# Altium PCB v3.pcbdoc
Units mm, origin at the board's own origin, x right, y up, seen from the top; angles counter-clockwise.
Board outline 55.63 x 53.1 mm, 2 copper layers (Top Layer, Bottom Layer); 30 components, 26 nets, 99 pads, 22 vias.
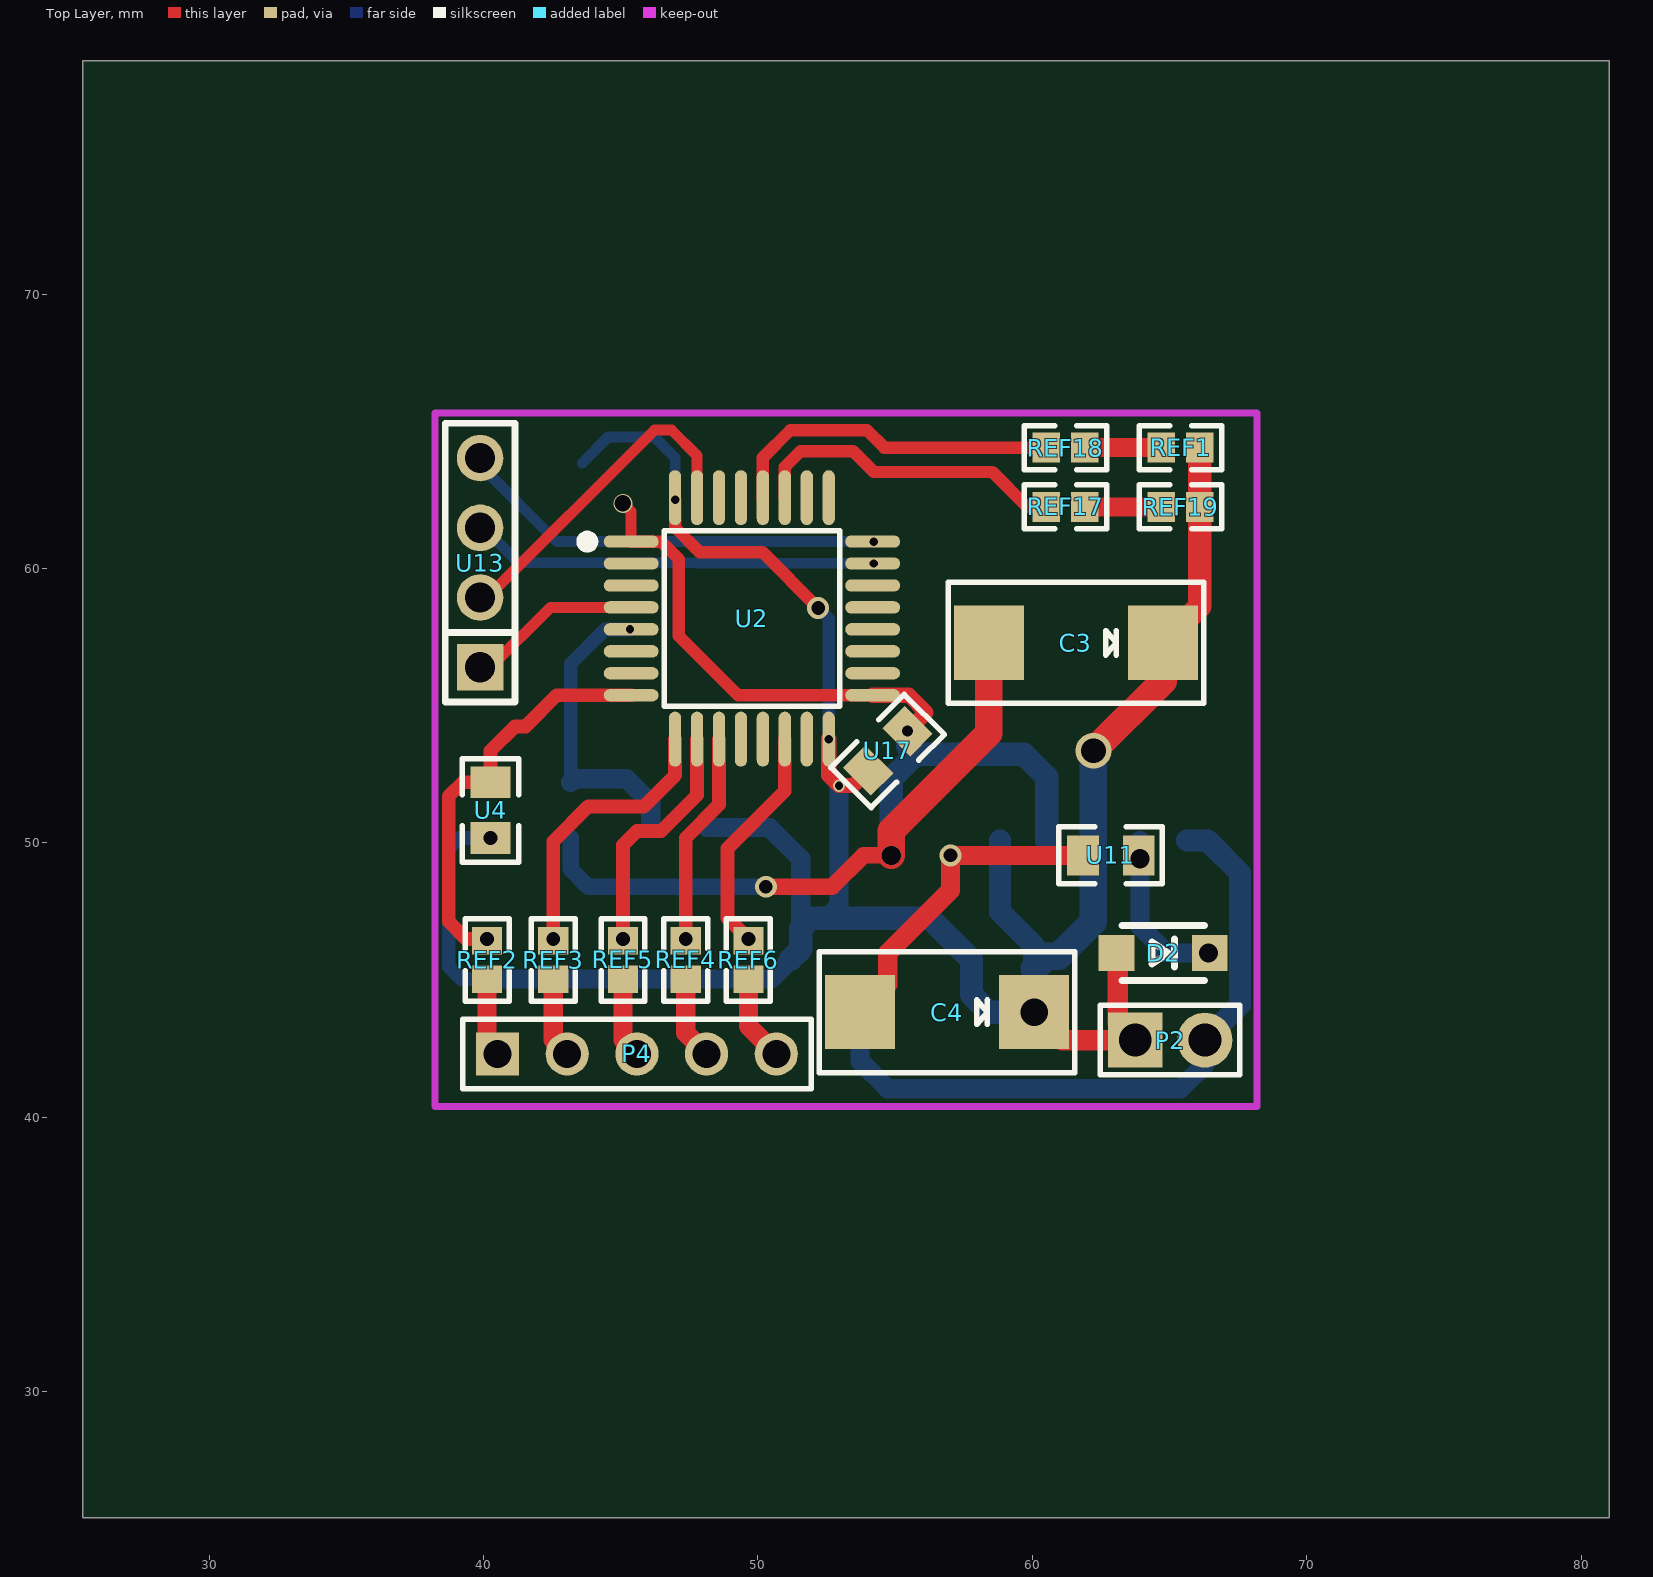
[diagram p0: Top Layer view]
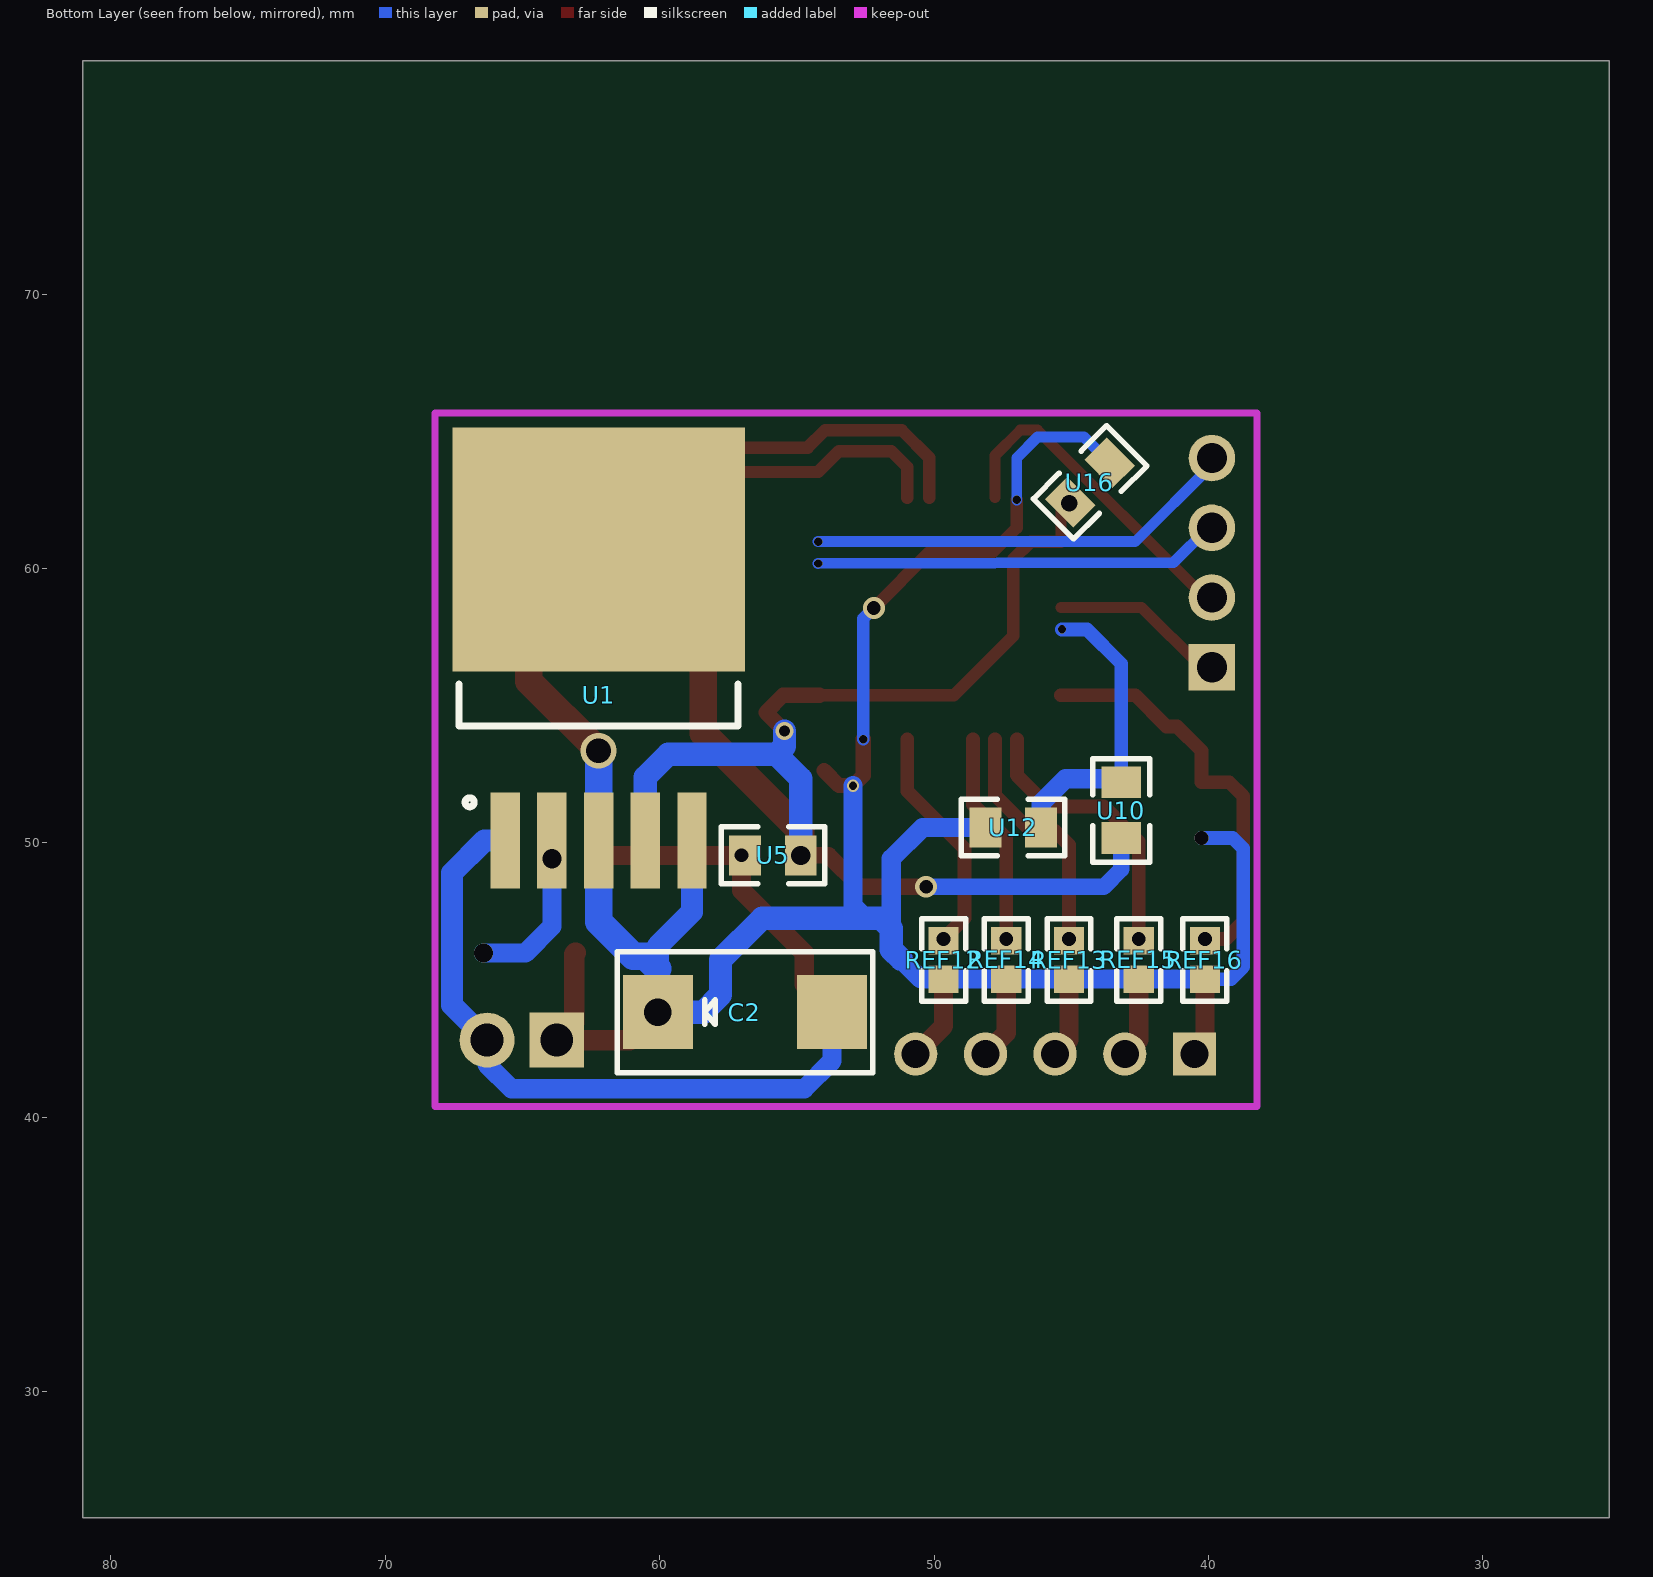
[diagram p1: Bottom Layer view, seen from below]

## Layer stack, top to bottom
Top Layer: signal copper (thickness not stored)
Dielectric: dielectric 0.32, FR-4, Dk 4.8
Bottom Layer: signal copper (thickness not stored)

## Board outline
81.026,25.4 25.4,25.4 25.4,78.504 81.026,78.504

## Components (designator, comment, footprint, x,y, rotation, side; value= is the part's Value field where it differs from the comment)
C2 "EIA7343-31/D-R" EIA7343-31/D-R#1 60.071,43.833 r180 bottom
C3 "EIA7343-31/D-R" EIA7343-31/D-R#2 64.77,57.295 r0 top
C4 "EIA7343-31/D-R" EIA7343-31/D-R#2 60.071,43.833 r0 top
D2 "DIODE_SOD-123FL" DIODE_SOD-123FL 64.77,45.992 r180 top
P2 "HDR-TH_2P-P2.54-V-M" HDR-TH_2P-P2.54-V-M 65.024,42.817 r0 top
P4 "HDR-5X1/2.54" HDR-5X1/2.54 45.593,42.309 r0 top
REF1 "0603" 0603#1 65.405,64.407 r0 top
REF2 "0603" 0603#1 40.132,45.738 r90 top
REF3 "0603" 0603#1 42.545,45.738 r90 top
REF4 "0603" 0603#1 47.371,45.738 r90 top
REF5 "0603" 0603#1 45.085,45.738 r90 top
REF6 "0603" 0603#1 49.657,45.738 r90 top
REF12 "0603" 0603#2 49.657,45.738 r270 bottom
REF13 "0603" 0603#2 45.085,45.738 r270 bottom
REF14 "0603" 0603#2 47.371,45.738 r270 bottom
REF15 "0603" 0603#2 42.545,45.738 r270 bottom
REF16 "0603" 0603#2 40.132,45.738 r270 bottom
REF17 "0603" 0603#1 61.214,62.248 r0 top
REF18 "0603" 0603#1 61.214,64.407 r0 top
REF19 "0603" 0603#1 65.405,62.248 r0 top
U1 "TO-263-5_L10.6-W9.6-P1.70-LS15.9-BR" TO-263-5_L10.6-W9.6-P1.70-LS15.9-BR 62.23,55.39 r90 bottom
U2 "TQFP-32_L7.0-W7.0-P0.50-BL" TQFP-32_L7.0-W7.0-P0.50-BL 49.784,58.184 r270 top
U4 "0805" 0805#1 40.259,51.199 r90 top
U5 "0805" 0805#2 55.88,49.548 r180 bottom
U10 "0805" 0805#2 43.18,51.199 r270 bottom
U11 "0805" 0805#1 62.865,49.548 r0 top
U12 "0805" 0805#2 47.117,50.564 r0 bottom
U13 "DIP-1X4P2.54" DIP-1X4P2.54 39.878,60.216 r90 top
U16 "0805" 0805#2 44.323,63.137 r135 bottom
U17 "0805" 0805#1 54.737,53.358 r45 top

## Footprints (in the part's own frame and the unit in brackets; to place one, negate y for a bottom-side part, rotate by r counter-clockwise, add the part's x,y. Pads: shape width x height; smd on the part's side, far side on the other; paste and mask are expansions set on the pad)
0603#1 [mm]
  rect 1x1.1 smd: 1(-0.7,0) 2(0.7,0)
  silkscreen extent -1.5,-0.8 1.5,0.8
0603#2 [mm]
  rect 1x1.1 smd: 1(0.7,0) 2(-0.7,0)
  silkscreen extent -1.5,-0.8 1.5,0.8
0805#1 [mm]
  rect 1.16x1.45 smd: 1(-1.016,0) 2(1.016,0)
  silkscreen extent -1.9,-1.03 1.87,1.04
0805#2 [mm]
  rect 1.16x1.45 smd: 1(1.016,0) 2(-1.016,0)
  silkscreen extent -1.87,-1.04 1.9,1.03
DIODE_SOD-123FL [mm]
  rect 1.3x1.3 smd: 1(-1.7,0) 2(1.7,0)
  silkscreen extent -1.5,-1 1.5,1
DIP-1X4P2.54 [mm]
  rect 1.7x1.7 hole 1.1: 1(-3.81,0)
  round 1.7 hole 1.1: 2(-1.27,0) 3(1.27,0) 4(3.81,0)
  silkscreen extent -5.08,-1.27 5.08,1.27
EIA7343-31/D-R#1 [mm]
  rect 2.55x2.7 smd: +(0,0) -(6.35,0)
  silkscreen extent -1.48,-2.2 7.83,2.2
EIA7343-31/D-R#2 [mm]
  rect 2.55x2.7 smd: +(0,0) -(-6.35,0)
  silkscreen extent -7.83,-2.2 1.48,2.2
HDR-5X1/2.54 [mil]
  rect 62x62 hole 40.16: 1(-200,0)
  round 62 hole 40.16: 2(-100,0) 3(0,0) 4(100,0) 5(200,0)
  silkscreen extent -250,-50 250,50
HDR-TH_2P-P2.54-V-M [mm]
  rect 2x2 hole 1.2: 1(-1.27,0)
  round 2 hole 1.2: 2(1.27,0)
  silkscreen extent -2.54,-1.27 2.54,1.27
TO-263-5_L10.6-W9.6-P1.70-LS15.9-BR [mm]
  rect 3.5x1.069 smd: 1(-5.3,3.404) 2(-5.3,1.702) 3(-5.3,0) 4(-5.3,-1.702) 5(-5.3,-3.404)
  rect 8.89x10.66 smd: 6(5.3,0)
  silkscreen extent -4.07,-5.08 0.41,5.08
TQFP-32_L7.0-W7.0-P0.50-BL [mm]
  oval 0.45x2 smd: 1(-2.8,-4.4) 2(-2,-4.4) 3(-1.2,-4.4) 4(-0.4,-4.4) 5(0.4,-4.4) 6(1.2,-4.4) 7(2,-4.4) 8(2.8,-4.4) 17(2.8,4.4) 18(2,4.4) 19(1.2,4.4) 20(0.4,4.4) 21(-0.4,4.4) 22(-1.2,4.4) 23(-2,4.4) 24(-2.8,4.4)
  oval 2x0.45 smd: 9(4.4,-2.8) 10(4.4,-2) 11(4.4,-1.2) 12(4.4,-0.4) 13(4.4,0.4) 14(4.4,1.2) 15(4.4,2) 16(4.4,2.8) 25(-4.4,2.8) 26(-4.4,2) 27(-4.4,1.2) 28(-4.4,0.4) 29(-4.4,-0.4) 30(-4.4,-1.2) 31(-4.4,-2) 32(-4.4,-2.8)
  silkscreen extent -3.2,-6.2 3.2,3.2

## Via types
v1: diameter 0.5, hole 0.5, Top Layer to Bottom Layer, 6 vias
v2: diameter 0.305, hole 0.305, Top Layer to Bottom Layer, 5 vias
v3: diameter 0.7, hole 0.7, Top Layer to Bottom Layer, 3 vias
v4: diameter 0.8, hole 0.5, Top Layer to Bottom Layer, 3 vias
v5: diameter 0.7, hole 0.6, Top Layer to Bottom Layer, 1 vias
v6: diameter 1, hole 1, Top Layer to Bottom Layer, 1 vias
v7: diameter 1.3, hole 0.9, Top Layer to Bottom Layer, 1 vias
v8: diameter 0.45, hole 0.305, Top Layer to Bottom Layer, 1 vias
v9: diameter 0.65, hole 0.4, Top Layer to Bottom Layer, 1 vias

## Nets (pads, with @x,y where several pads share a name; then routed paths per layer and width w, separated by ;. In a path a pad name is that pad's centre, name@x,y a point inside that pad or via, vN(x,y) a via of type N, cw(c..) or ccw(c..) an arc to the next point about the centre after c; other vN are vias at no path point)
S$67: 
S$69: 
S$7983: REF1.1 REF18.2 | length 2.8
  Top Layer w0.7: REF18.2 REF1.1@64.705,64.407
S$7986: REF17.2 REF19.1 | length 2.8
  Top Layer w0.7: REF17.2 REF19.1
S$7989: REF17.1 U2.27 | length 11.7
  Top Layer w0.45: U2.27 50.983,63.7 51.562,64.28 53.467,64.28 54.229,63.518 58.547,63.518 59.817,62.248 REF17.1
S$7993: REF18.1 U2.28 | length 12.5
  Top Layer w0.45: U2.28 50.183,64.043 51.181,65.042 53.975,65.042 54.61,64.407 REF18.1
S$8037: U13.3 U13.4 | length 30.6
  Bottom Layer w0.4: U13.3 40.005,61.486 41.275,60.216 v2(54.229,60.186) ; U13.4 39.878,63.772 42.672,60.978 v2(54.229,60.978)
S$8066: U2.31 U13.2 | length 12.4
  Top Layer w0.4: U13.2 40.132,58.946 46.228,65.042 46.863,65.042 47.785,64.12 U2.31
S$8069: U2.4 U13.1 | length 8.8
  Top Layer w0.4: U13.1 40.259,56.406 42.437,58.584 U2.4 ; 43.035,58.585 U2.4@45.385,58.585
S$8079: C2.+ REF12.1 REF16.1 U1.4 U2.1 U2.16 U2.17 U5.1 U12.1 U16.1 U17.1 U17.2 | length 92.3
  Top Layer w0.4: v5(45.085,62.375) 45.384,62.076 U2.1
  Top Layer w0.45: U2.1 46.477,60.983 47.117,60.343 47.117,57.549 49.281,55.384 U2.17 ; v2(46.99,62.502) 46.99,61.486 47.879,60.597 50.165,60.597 v4(52.197,58.565)
  Top Layer w0.55: v2(52.584,53.784) 52.584,52.463 v8(52.959,52.088) 53.467,52.088 U17.1 ; U2.17 55.505,55.384 56.134,54.755 v9(55.455,54.076)
  Bottom Layer w0.4: U16.1 44.537,64.788 46.228,64.788 46.99,64.026 v2(46.99,62.502)
  Bottom Layer w0.45: v4(52.197,58.565) 52.584,58.178 v2(52.584,53.784)
  Bottom Layer w0.5: REF16.1 39.181,45.038 38.735,45.484 38.735,49.802 39.116,50.183 v1(40.259,50.183)
  Bottom Layer w0.7: REF16.1 REF12.1 ; U12.1 50.419,50.564 51.562,49.421 51.562,46.246 ; 52.514,47.262 52.959,47.706 v8(52.959,52.088)
  Bottom Layer w0.85: 51.204,45.76 51.562,46.119 51.562,46.881 51.943,47.262 56.261,47.262 57.785,45.738 57.785,44.468 58.42,43.833 C2.+ ; U5.1 54.864,52.342 55.753,53.231 ; v9(55.455,54.076) 55.455,53.528 55.753,53.231 ; U1.4 60.528,52.392 59.69,53.231 55.753,53.231
S$8100: U10.2 U12.2 | length 11.2
  Bottom Layer w0.5: U10.2 43.18,56.533 44.43,57.783 v2(45.339,57.783)
  Bottom Layer w0.7: U10.2 43.307,52.342 45.212,52.342 46.101,51.453 U12.2
S$8114: P4.1 REF2.1 | length 2.9
  Top Layer w0.7: REF2.1 40.132,42.69 P4.1
S$8117: P4.2 REF3.1 | length 2.9
  Top Layer w0.7: REF3.1 42.545,42.817 P4.2
S$8119: P4.3 REF5.1 | length 2.9
  Top Layer w0.7: REF5.1 45.085,42.817 P4.3
S$8121: P4.4 REF4.1 | length 3
  Top Layer w0.7: REF4.1 47.371,43.071 P4.4
S$8123: P4.5 REF6.1 | length 3.1
  Top Layer w0.7: REF6.1 49.657,43.325 P4.5
S$8179: U2.8 U4.2 | length 15.1
  Top Layer w0.5: v1(40.132,46.5) 39.37,46.5 38.735,47.135 38.735,51.707 39.243,52.215 U4.2 40.259,53.358 41.148,54.247 41.529,54.247 42.667,55.384 U2.8
S$8183: U2.9 | length 10.3
  Top Layer w0.5: v1(42.545,46.5) 42.545,50.056 43.815,51.326 45.847,51.326 46.984,52.462 U2.9
S$8186: U2.10 | length 8.9
  Top Layer w0.5: v1(45.085,46.5) 45.085,49.929 45.593,50.437 46.482,50.437 47.785,51.74 U2.10
S$8189: U2.11 | length 7.8
  Top Layer w0.5: v1(47.371,46.5) 47.371,50.183 48.584,51.396 U2.11
S$8192: U2.14 | length 8.5
  Top Layer w0.5: v1(49.657,46.5) 48.895,47.262 48.895,49.802 50.983,51.889 U2.14
S$8223: C2.- P2.2 U1.1 | length 25.1
  Bottom Layer w0.7: C2.- 53.721,42.055 54.737,41.039 65.405,41.039 66.294,41.928 P2.2
  Bottom Layer w0.8: U1.1 66.388,50.089 67.564,48.913 67.564,44.087 P2.2
S$8231: U1.2 | length 6
  Bottom Layer w0.7: U1.2 v3(63.932,49.421) 63.932,46.957 64.897,45.992 v3(66.421,45.992)
S$8242: C4.- U11.1 | length 11.9
  Top Layer w0.7: C4.- 54.737,44.849 54.737,45.992 57.023,48.278 v4(57.023,49.548) U11.1
S$8297: C3.- U10.1 | length 22.8
  Top Layer w0.6: v4(50.292,48.405) 52.705,48.405 53.848,49.548 v3(54.864,49.548)
  Top Layer w1: v3(54.864,49.548) 54.864,50.437 58.42,53.993 C3.-
  Bottom Layer w0.6: U10.1 43.18,49.04 43.815,48.405 v4(50.292,48.405)
S$8457: C3.+ C4.+ D2.2 P2.1 REF1.2 REF19.2 U1.3 U1.5 | length 38.2
  Top Layer w0.75: C4.+@60.452,43.452 v6(60.071,43.833) 61.087,42.817 P2.1 63.119,43.452 63.119,45.943 D2.2
  Top Layer w0.85: C3.+ 66.105,58.63 REF19.2 REF1.2
  Top Layer w1: v7(62.23,53.358) 64.77,55.898 C3.+
  Bottom Layer w0.8: U1.5 58.826,47.49 60.071,46.246 v6(60.071,43.833) 60.071,45.41
  Bottom Layer w1: 60.071,45.41 60.526,45.865 60.96,45.865 62.23,47.135 U1.3 ; U1.3 v7(62.23,53.358)
pads on no net: D2.1 REF2.2 REF3.2 REF4.2 REF5.2 REF6.2 REF12.2 REF13.1 REF13.2 REF14.1 REF14.2 REF15.1 REF15.2 REF16.2 U1.6 U2.2 U2.3 U2.5 U2.6 U2.7 U2.12 U2.13 U2.15 U2.18 U2.19 U2.20 U2.21 U2.22 U2.23 U2.24 U2.25 U2.26 U2.29 U2.30 U2.32 U4.1 U5.2 U11.2 U16.2
copper on no net: | length 2.4
  Bottom Layer w0.7: 49.657,45.037 50.48,45.037 51.562,46.119